# Altium PCB AICat V1.7 双面板 板厚1.6mm_lrd.PcbDoc (part 6 of 6)
Units mm, origin at the board's own origin, x right, y up, seen from the top; angles counter-clockwise.
Board outline 63.83 x 43.59 mm, 2 copper layers (Top Layer, Bottom Layer); 123 components, 84 nets, 332 pads, 255 vias.
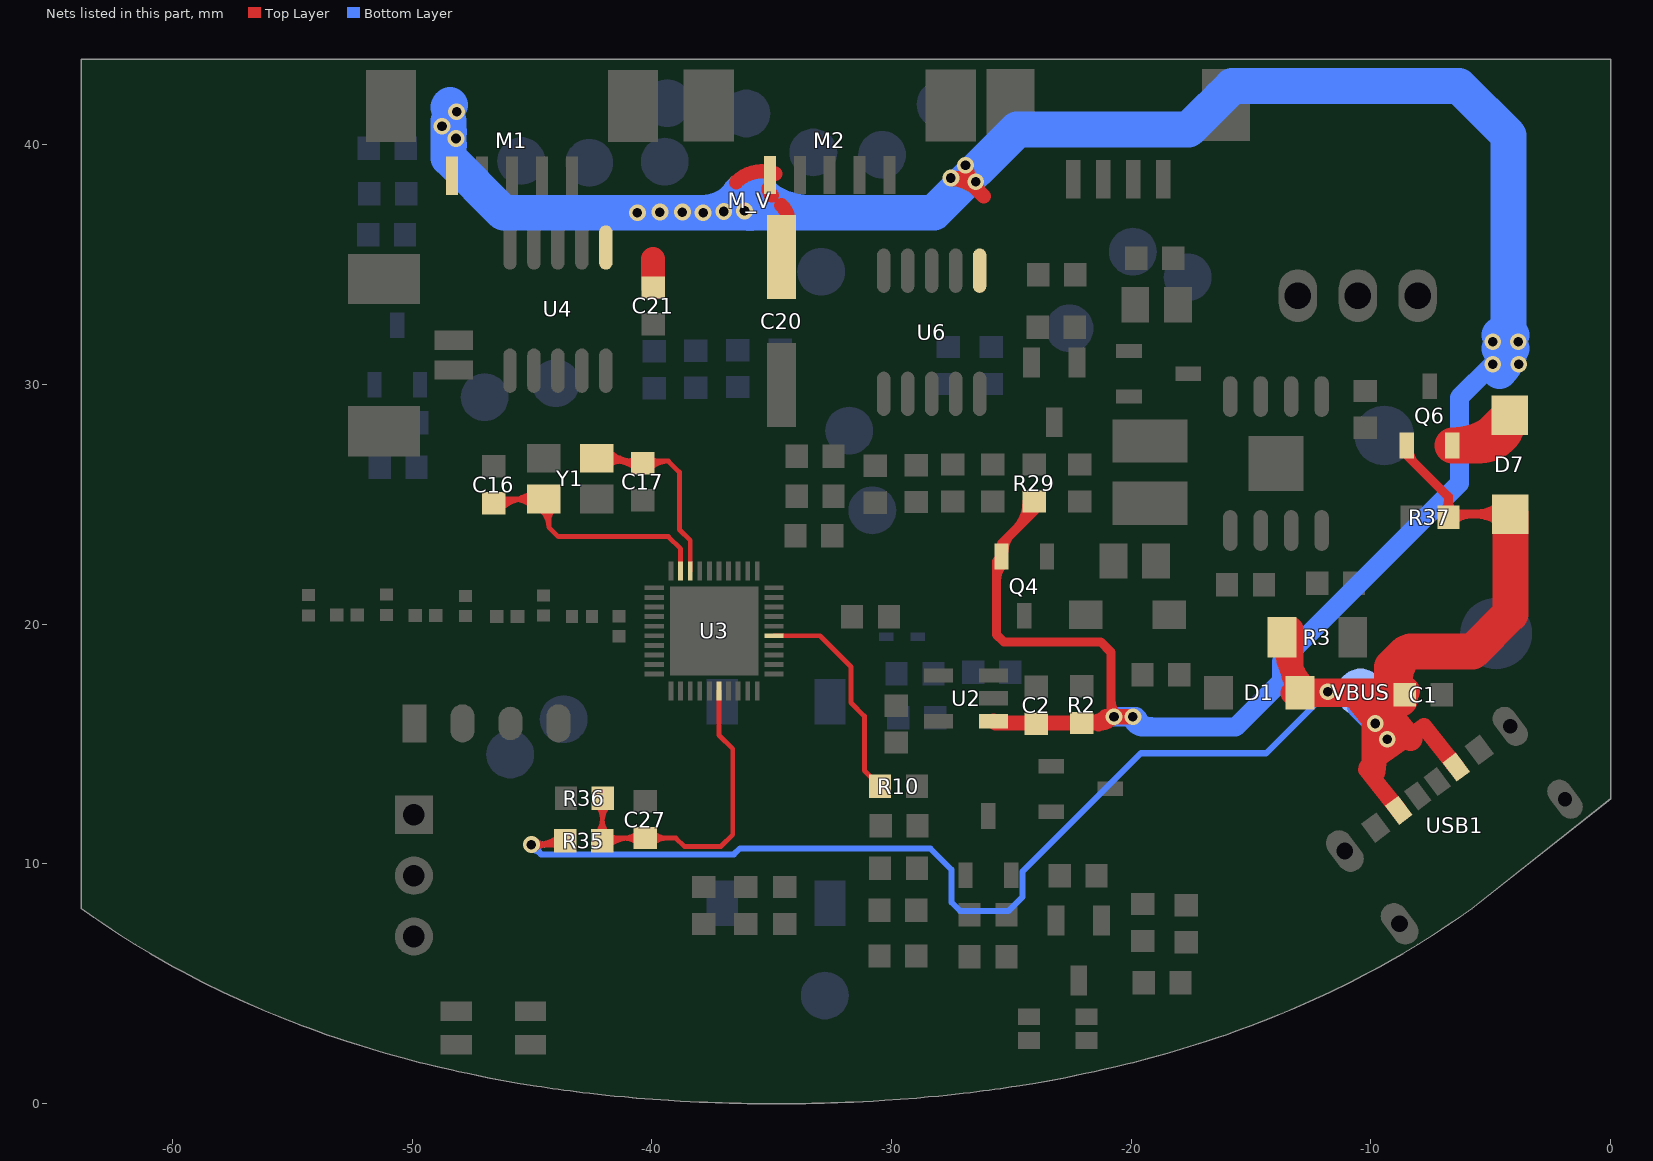
[diagram p6: the nets of this part, all layers, seen from the top]

## Via types
v1: diameter 0.7, hole 0.4, Top Layer to Bottom Layer, tented both sides, 255 vias

## Nets (pads, with @x,y where several pads share a name; then routed paths per layer and width w, separated by ;. In a path a pad name is that pad's centre, name@x,y a point inside that pad or via, vN(x,y) a via of type N, cw(c..) or ccw(c..) an arc to the next point about the centre after c; other vN are vias at no path point) (continued)
USB_DEC: C27.2 R35.2 R36.1 U3.6 | length 43.7
  Top Layer w0.203: R36.1@-42.047,12.731 -42.073,12.706 R35.2@-42.073,10.953 -41.954,11.072 C27.2@-40.277,11.072 -38.999,11.072 -38.652,10.724 -37.117,10.724 -36.625,11.216 -36.625,14.794 -37.203,15.372 U3.6@-37.203,17.214 ; R35.2@-42.33,11.235 ccw(c-42.95,11.855) -42.073,11.855 ; R35.2@-42.33,11.235 ccw(c-42.95,11.855) -42.073,11.855 ; R35.2@-42.33,11.235 ccw(c-42.95,11.855) -42.073,11.855 ; R35.2@-42.33,11.235 ccw(c-42.95,11.855) -42.073,11.855 ; R36.1@-42.304,12.449 cw(c-42.863,11.89) -42.073,11.89 ; R36.1@-42.304,12.449 cw(c-42.863,11.89) -42.073,11.89 ; R36.1@-42.304,12.449 cw(c-42.863,11.89) -42.073,11.89 ; R36.1@-42.304,12.449 cw(c-42.863,11.89) -42.073,11.89 ; -42.073,11.767 cw(c-41.109,11.767) R36.1@-41.79,12.449 ; -42.073,11.767 cw(c-41.109,11.767) R36.1@-41.79,12.449 ; -42.073,11.767 cw(c-41.109,11.767) R36.1@-41.79,12.449 ; -42.073,11.767 cw(c-41.109,11.767) R36.1@-41.79,12.449 ; -42.073,11.855 ccw(c-41.195,11.855) R35.2@-41.816,11.235 ; -42.073,11.855 ccw(c-41.195,11.855) R35.2@-41.816,11.235 ; -42.073,11.855 ccw(c-41.195,11.855) R35.2@-41.816,11.235 ; -42.073,11.855 ccw(c-41.195,11.855) R35.2@-41.816,11.235 ; R35.2@-41.959,10.865 cw(c-41.459,10.364) -41.459,11.072 ; R35.2@-41.959,10.865 cw(c-41.459,10.364) -41.459,11.072 ; R35.2@-41.959,10.865 cw(c-41.459,10.364) -41.459,11.072 ; R35.2@-41.959,10.865 cw(c-41.459,10.364) -41.459,11.072 ; R35.2@-41.816,10.721 cw(c-40.968,9.874) -40.968,11.072 ; R35.2@-41.816,10.721 cw(c-40.968,9.874) -40.968,11.072 ; R35.2@-41.816,10.721 cw(c-40.968,9.874) -40.968,11.072 ; R35.2@-41.816,10.721 cw(c-40.968,9.874) -40.968,11.072 ; R35.2@-41.816,11.235 ccw(c-41.422,11.628) -41.422,11.072 ; R35.2@-41.816,11.235 ccw(c-41.422,11.628) -41.422,11.072 ; R35.2@-41.816,11.235 ccw(c-41.422,11.628) -41.422,11.072 ; R35.2@-41.816,11.235 ccw(c-41.422,11.628) -41.422,11.072 ; -41.18,11.072 cw(c-41.18,10.195) C27.2@-40.559,10.815 ; -41.18,11.072 ccw(c-41.18,11.949) C27.2@-40.559,11.329 ; -41.18,11.072 cw(c-41.18,10.195) C27.2@-40.559,10.815 ; -41.18,11.072 ccw(c-41.18,11.949) C27.2@-40.559,11.329 ; -41.18,11.072 ccw(c-41.18,11.949) C27.2@-40.559,11.329 ; -41.18,11.072 cw(c-41.18,10.195) C27.2@-40.559,10.815 ; -41.18,11.072 ccw(c-41.18,11.949) C27.2@-40.559,11.329 ; -41.18,11.072 cw(c-41.18,10.195) C27.2@-40.559,10.815 ; C27.2@-39.995,10.815 cw(c-39.375,10.195) -39.375,11.072 ; C27.2@-39.995,10.815 cw(c-39.375,10.195) -39.375,11.072 ; C27.2@-39.995,10.815 cw(c-39.375,10.195) -39.375,11.072 ; C27.2@-39.995,10.815 cw(c-39.375,10.195) -39.375,11.072 ; C27.2@-39.995,11.329 ccw(c-39.375,11.949) -39.375,11.072 ; C27.2@-39.995,11.329 ccw(c-39.375,11.949) -39.375,11.072 ; C27.2@-39.995,11.329 ccw(c-39.375,11.949) -39.375,11.072 ; C27.2@-39.995,11.329 ccw(c-39.375,11.949) -39.375,11.072
V_BAT_CON: R10.2 U3.15 | length 9.6
  Top Layer w0.203: U3.15@-34.904,19.514 -32.988,19.514 -31.692,18.217 -31.692,16.719 -31.133,16.16 -31.133,14.534 ; -31.133,14.153 -31.133,14.534 ; R10.2@-30.481,13.239 -31.133,13.891 -31.133,14.534
VBUS_BAT: C2.2 C20.1 C21.2 D7.2 M1.5 M2.5 M_V.1 Q4.2 Q6.2 R2.1 R29.1 U2.1 U4.6 U6.6 | length 186.7
  Top Layer w0.203: C21.2@-40.258,34.05 C21.2@-39.947,34.05
  Top Layer w0.381: R29.1@-24.047,25.118 -24.047,24.72 -25.415,23.351 Q4.2@-25.415,22.823 -25.621,22.616 -25.621,19.564 -25.317,19.259 -21.278,19.259 -20.846,18.827 -20.846,16.355 v1@-21.067,16.135 ; -25.621,21.825 cw(c-24.653,21.825) Q4.2@-25.338,22.51 ; -25.621,21.825 cw(c-24.653,21.825) Q4.2@-25.338,22.51 ; -25.621,21.825 cw(c-24.653,21.825) Q4.2@-25.338,22.51 ; Q4.2@-25.306,23.058 cw(c-24.333,23.058) -25.021,23.746 ; Q4.2@-25.306,23.058 cw(c-24.333,23.058) -25.021,23.746 ; Q4.2@-25.306,23.058 cw(c-24.333,23.058) -25.021,23.746 ; -24.84,23.927 ccw(c-26.031,25.118) R29.1@-24.346,25.118 ; -24.84,23.927 ccw(c-26.031,25.118) R29.1@-24.346,25.118 ; -24.84,23.927 ccw(c-26.031,25.118) R29.1@-24.346,25.118 ; -24.189,24.577 ccw(c-24.73,25.118) R29.1@-23.965,25.118 ; -24.189,24.577 ccw(c-24.73,25.118) R29.1@-23.965,25.118 ; -24.189,24.577 ccw(c-24.73,25.118) R29.1@-23.965,25.118 ; -20.846,16.826 ccw(c-20.028,16.826) v1@-20.606,16.247 ; -20.846,16.826 ccw(c-20.028,16.826) v1@-20.606,16.247 ; -20.846,16.826 ccw(c-20.028,16.826) v1@-20.606,16.247
  Top Layer w0.508: C2.2@-24.109,15.709 C2.2@-23.97,15.847
  Top Layer w0.6: -36.485,38.443 cw(c-35.394,37.352) M2.5@-34.853,38.797 ; M2.5@-35.131,38.188 ccw(c-34.71,38.188) -35.008,37.891 ; -34.602,37.485 cw(c-35.36,36.727) C20.1@-34.291,36.644 ; -26.968,38.664 -26.155,37.852 ; v1@-27.526,38.564 cw(c-27.526,36.971) -26.4,38.097 ; v1@-27.526,38.564 cw(c-27.526,36.971) -26.4,38.097 ; v1@-27.526,38.564 cw(c-27.526,36.971) -26.4,38.097 ; v1@-27.511,38.566 cw(c-27.257,37.766) v1@-26.663,38.36 ; v1@-27.511,38.566 cw(c-27.257,37.766) v1@-26.663,38.36 ; v1@-27.511,38.566 cw(c-27.257,37.766) v1@-26.663,38.36 ; v1@-26.867,39.147 ccw(c-25.458,39.147) v1@-26.454,38.151 ; v1@-26.867,39.147 ccw(c-25.458,39.147) v1@-26.454,38.151 ; v1@-26.867,39.147 ccw(c-25.458,39.147) v1@-26.454,38.151 ; v1@-26.436,38.452 ccw(c-25.931,38.355) -26.295,37.991 cw(c-25.931,38.355) v1@-26.436,38.452
  Top Layer w0.635: U2.1@-25.744,15.955 -25.662,15.873 R2.1@-22.065,15.873 ; R2.1@-21.888,15.873 R2.1@-22.065,15.873 ; v1@-19.983,16.135 v1(-20.719,16.135) v1@-21.067,16.135 ; R2.1@-22.065,15.873 -21.329,15.873 ; R2.1@-21.97,16.002 ccw(c-21.607,16.675) v1@-21.067,16.135 ; R2.1@-21.97,16.002 ccw(c-21.607,16.675) v1@-21.067,16.135 ; R2.1@-21.97,16.002 ccw(c-21.607,16.675) v1@-21.067,16.135 ; -21.43,15.873 ccw(c-21.43,16.845) v1@-20.742,16.158 ; -21.43,15.873 ccw(c-21.43,16.845) v1@-20.742,16.158 ; -21.43,15.873 ccw(c-21.43,16.845) v1@-20.742,16.158 ; -21.368,15.833 cw(c-20.719,15.184) v1@-20.719,16.102 ; -21.368,15.833 cw(c-20.719,15.184) v1@-20.719,16.102 ; -21.368,15.833 cw(c-20.719,15.184) v1@-20.719,16.102 ; -21.329,15.873 ccw(c-21.329,16.618) v1@-20.745,16.155 ; -21.329,15.873 ccw(c-21.329,16.618) v1@-20.745,16.155 ; -21.329,15.873 ccw(c-21.329,16.618) v1@-20.745,16.155 ; -21.329,15.873 v1@-21.067,16.135
  Top Layer w1: C21.2@-39.947,34.05 -39.947,35.235
  Top Layer w1.5: D7.2@-4.209,28.706 -5.46,27.455 ; Q6.2@-6.6,27.455 ccw(c-6.6,30.412) D7.2@-4.221,28.655 ; Q6.2@-6.6,27.455 ccw(c-6.6,30.412) D7.2@-4.221,28.655 ; Q6.2@-6.6,27.455 ccw(c-6.6,30.412) D7.2@-4.221,28.655 ; Q6.2@-6.6,27.455 -5.46,27.455 ; -5.46,27.455 ccw(c-5.46,28.692) D7.2@-4.224,28.647 ; -5.46,27.455 ccw(c-5.46,28.692) D7.2@-4.224,28.647 ; -5.46,27.455 ccw(c-5.46,28.692) D7.2@-4.224,28.647
  Bottom Layer w0.8: v1@-20.745,16.16 v1(-20.719,16.135) v1(-19.932,16.135) -19.805,16.135 -19.729,16.058 -19.729,15.957 -19.475,15.703 ; v1(-4.92,30.841) -6.299,29.462 -6.299,25.881 -13.734,18.446 -13.734,17.616 -15.648,15.703 -19.475,15.703 ; v1@-19.981,16.126 ccw(c-19.475,16.217) -19.475,15.703 ; v1@-19.981,16.126 ccw(c-19.475,16.217) -19.475,15.703 ; v1@-19.981,16.126 ccw(c-19.475,16.217) -19.475,15.703 ; v1@-19.967,16.099 ccw(c-19.01,17.056) -19.01,15.703 ; v1@-19.967,16.099 ccw(c-19.01,17.056) -19.01,15.703 ; v1@-19.967,16.099 ccw(c-19.01,17.056) -19.01,15.703
  Bottom Layer w1.5: -48.481,41.001 -48.481,39.452 -46.195,37.166 -42.258,37.166 ; -44.189,37.166 -42.258,37.166 ; M_V.1@-36.316,37.964 cw(c-37.864,39.067) v1(-37.864,37.166) ; M_V.1@-35.555,38.027 ccw(c-33.475,40.107) -33.475,37.166 ; -4.26,31.705 -4.26,40.392 -6.317,42.449 -15.792,42.449 -16.274,41.966 -16.997,41.243 -17.603,40.638 -23.742,40.638 -24.766,40.638 -28.238,37.166 -28.847,37.166 -30.092,37.166 v1(-37.864,37.166) ; -48.481,41.551 cw(c-48.32,41.551) -48.434,41.665 ; -48.481,41.551 cw(c-48.32,41.551) -48.434,41.665 ; -48.481,41.551 cw(c-48.32,41.551) -48.434,41.665 ; -48.481,41.551 cw(c-48.32,41.551) -48.434,41.665 ; -42.258,37.166 v1(-40.607,37.166) ; -42.258,37.166 v1(-40.607,37.166) ; v1(-40.607,37.166) v1(-37.864,37.166) ; -4.638,30.558 ccw(c-5.549,31.47) -4.26,31.47 ; -4.638,30.558 ccw(c-5.549,31.47) -4.26,31.47 ; -4.638,30.558 ccw(c-5.549,31.47) -4.26,31.47 ; -4.638,30.558 ccw(c-5.549,31.47) -4.26,31.47 ; -4.638,30.558 ccw(c-5.549,31.47) -4.26,31.47 ; -4.638,30.558 ccw(c-5.549,31.47) -4.26,31.47 ; -4.638,31.498 ccw(c-5.549,32.41) -4.26,32.41 ; -4.638,31.498 ccw(c-5.549,32.41) -4.26,32.41 ; -4.638,31.498 ccw(c-5.549,32.41) -4.26,32.41 ; -4.638,32.064 cw(c-5.549,31.152) -4.26,31.152 ; -4.638,32.064 cw(c-5.549,31.152) -4.26,31.152 ; -4.638,32.064 cw(c-5.549,31.152) -4.26,31.152 ; -4.26,31.766 cw(c-3.838,31.766) -4.136,32.064 ; -4.26,31.766 cw(c-3.838,31.766) -4.136,32.064 ; -4.26,31.766 cw(c-3.838,31.766) -4.136,32.064 ; -4.26,31.796 ccw(c-3.838,31.796) -4.136,31.498 ; -4.26,31.796 ccw(c-3.838,31.796) -4.136,31.498 ; -4.26,31.796 ccw(c-3.838,31.796) -4.136,31.498 ; -48.481,40.035 ccw(c-48.406,40.035) -48.459,39.982 cw(c-48.406,40.035) -48.481,40.035 ; -48.481,40.494 cw(c-48.406,40.494) -48.459,40.547 ccw(c-48.406,40.494) -48.481,40.494
  other v1: -3.828,30.841 -4.92,31.781 -3.854,31.781 -39.668,37.191 -38.728,37.191 -37.001,37.217 -36.137,37.242 -26.485,38.461 -27.526,38.614 -26.917,39.147 -48.177,40.265 -48.761,40.773 -48.151,41.382
VCC_USB: C1.2 D1.2 D7.1 Q6.1 R3.2 R35.1 R37.2 USB1.A9 USB1.B9 VBUS.1 | length 160
  Top Layer w0.254: v1(-45.027,10.801) -43.765,10.801 R35.1@-43.613,10.953 ; v1@-44.869,10.643 cw(c-44.489,10.262) -44.489,10.801 ; v1@-44.869,10.643 cw(c-44.489,10.262) -44.489,10.801 ; v1@-44.869,10.643 cw(c-44.489,10.262) -44.489,10.801 ; v1@-44.869,10.643 cw(c-44.489,10.262) -44.489,10.801 ; v1@-44.869,10.958 ccw(c-44.489,11.339) -44.489,10.801 ; v1@-44.869,10.958 ccw(c-44.489,11.339) -44.489,10.801 ; v1@-44.869,10.958 ccw(c-44.489,11.339) -44.489,10.801 ; v1@-44.869,10.958 ccw(c-44.489,11.339) -44.489,10.801 ; v1@-44.736,10.801 ccw(c-44.736,12.052) R35.1@-43.852,11.167 ; v1@-44.736,10.801 ccw(c-44.736,12.052) R35.1@-43.852,11.167 ; v1@-44.736,10.801 ccw(c-44.736,12.052) R35.1@-43.852,11.167 ; -44.123,10.801 ccw(c-44.123,11.438) R35.1@-43.672,10.987 ; -44.123,10.801 ccw(c-44.123,11.438) R35.1@-43.672,10.987 ; -44.123,10.801 ccw(c-44.123,11.438) R35.1@-43.672,10.987 ; -44.121,10.801 cw(c-44.121,10.42) R35.1@-43.852,10.689 ; -44.121,10.801 cw(c-44.121,10.42) R35.1@-43.852,10.689 ; -44.121,10.801 cw(c-44.121,10.42) R35.1@-43.852,10.689
  Top Layer w0.381: Q6.1@-8.5,27.455 -8.5,27.055 -6.767,25.321 R37.2@-6.767,24.466 -6.641,24.591 D7.1@-4.184,24.591 ; Q6.1@-8.39,27.22 ccw(c-7.726,27.22) -8.196,26.751 ; Q6.1@-8.39,27.22 ccw(c-7.726,27.22) -8.196,26.751 ; Q6.1@-8.39,27.22 ccw(c-7.726,27.22) -8.196,26.751 ; R37.2@-6.961,24.685 ccw(c-7.429,25.153) -6.767,25.153 ; R37.2@-6.961,24.685 ccw(c-7.429,25.153) -6.767,25.153 ; R37.2@-6.961,24.685 ccw(c-7.429,25.153) -6.767,25.153 ; -6.767,25.153 ccw(c-6.104,25.153) R37.2@-6.572,24.685 ; -6.767,25.153 ccw(c-6.104,25.153) R37.2@-6.572,24.685 ; -6.767,25.153 ccw(c-6.104,25.153) R37.2@-6.572,24.685 ; R37.2@-6.572,24.297 cw(c-5.862,23.586) -5.862,24.591 ; R37.2@-6.572,24.297 cw(c-5.862,23.586) -5.862,24.591 ; R37.2@-6.572,24.297 cw(c-5.862,23.586) -5.862,24.591 ; -5.571,24.591 cw(c-5.571,23.204) D7.1@-4.59,24.185 ; -5.571,24.591 ccw(c-5.571,25.978) D7.1@-4.59,24.997 ; -5.571,24.591 ccw(c-5.571,25.978) D7.1@-4.59,24.997 ; -5.571,24.591 cw(c-5.571,23.204) D7.1@-4.59,24.185 ; -5.571,24.591 ccw(c-5.571,25.978) D7.1@-4.59,24.997 ; -5.571,24.591 cw(c-5.571,23.204) D7.1@-4.59,24.185
  Top Layer w0.7: -10.185,13.922 USB1.B9@-8.836,12.228 ; -10.177,14.026 -7.79,15.728 USB1.A9@-6.441,14.033 ; v1(-9.315,15.195) ccw(c-9.06,16.714) -8.166,15.46 cw(c-9.06,16.714) v1(-9.315,15.195) ; v1(-9.315,15.195) cw(c-10.768,15.409) -9.915,14.213 ccw(c-10.768,15.409) v1(-9.315,15.195)
  Top Layer w1: R3.2@-13.556,19.31 ccw(c-10.654,19.31) D1.2@-12.706,17.257 ; R3.2@-13.302,19.804 -13.302,18.268 ; D1.2@-13.265,17.135 -13.223,17.176 D1.2@-12.833,17.176 ; -10.522,16.791 -9.792,15.88 -9.271,15.229 v1@-9.162,15.093 ; -9.893,17.135 -9.893,13.856 -9.574,16.737 -9.34,16.445 -8.603,15.525 ; R3.2@-13.776,19.119 cw(c-14.468,18.182) -13.302,18.182 ; R3.2@-13.776,19.119 cw(c-14.468,18.182) -13.302,18.182 ; R3.2@-13.776,19.119 cw(c-14.468,18.182) -13.302,18.182 ; -13.302,18.268 ccw(c-11.974,18.268) D1.2@-12.891,17.307 ; -13.302,18.268 ccw(c-11.974,18.268) D1.2@-12.891,17.307 ; -13.302,18.268 ccw(c-11.974,18.268) D1.2@-12.891,17.307 ; -13.302,18.303 ccw(c-11.892,18.303) D1.2@-12.889,17.305 ; -13.302,18.303 ccw(c-11.892,18.303) D1.2@-12.889,17.305 ; -13.302,18.303 ccw(c-11.892,18.303) D1.2@-12.889,17.305 ; v1@-9.884,15.992 cw(c-9.498,15.126) -8.759,15.719 ccw(c-9.498,15.126) v1@-9.884,15.992 ; v1@-9.806,16.004 cw(c-10.046,13.835) -8.343,15.2 ccw(c-10.046,13.835) v1@-9.806,16.004 ; -9.643,16.823 cw(c-11.39,15.424) -9.166,15.178 ccw(c-11.39,15.424) -9.643,16.823
  Top Layer w1.2: D1.2@-12.833,17.135 -9.893,17.135 -9.527,17.135 -9.492,17.1 -9.264,17.328 -9.111,17.328 C1.2@-9.018,17.328 ; -9.73,16.862 cw(c-8.829,15.962) C1.2@-8.557,17.206 ; -9.73,16.862 cw(c-8.829,15.962) C1.2@-8.557,17.206 ; -9.73,16.862 cw(c-8.829,15.962) C1.2@-8.557,17.206
  Top Layer w1.5: -9.111,17.295 -9.111,17.328 -9.111,18.217 -8.522,18.807 ; D7.1@-4.184,24.591 -4.184,20.427 -5.759,18.852 -8.359,18.852 -8.405,18.807 -8.522,18.807 ; -9.111,17.654 ccw(c-8.006,17.654) C1.2@-8.788,16.872 ; -9.111,17.654 ccw(c-8.006,17.654) C1.2@-8.788,16.872 ; -9.111,17.654 ccw(c-8.006,17.654) C1.2@-8.788,16.872 ; C1.2@-8.844,16.952 cw(c-7.367,17.651) -8.522,18.807 ; C1.2@-8.844,16.952 cw(c-7.367,17.651) -8.522,18.807 ; C1.2@-8.844,16.952 cw(c-7.367,17.651) -8.522,18.807
  Bottom Layer w0.254: v1(-45.027,10.801) -44.617,10.39 -36.582,10.39 -36.333,10.639 -28.381,10.639 -27.501,9.759 -27.501,8.388 -27.145,8.032 -25.113,8.032 -24.529,8.616 -24.529,9.683 -19.602,14.611 -14.369,14.611 v1(-11.804,17.176) ; v1@-44.869,10.643 cw(c-44.489,10.262) -44.489,10.801 cw(c-44.489,11.339) v1@-44.869,10.958 ; VBUS.1@-10.483,17.151 -10.508,17.176 v1(-11.804,17.176) ; v1@-45.027,10.578 cw(c-45.027,10.039) -44.646,10.42 ; v1@-45.027,10.578 cw(c-45.027,10.039) -44.646,10.42 ; v1@-45.027,10.578 cw(c-45.027,10.039) -44.646,10.42 ; v1@-44.804,10.801 ccw(c-44.266,10.801) -44.646,10.42 ; v1@-44.804,10.801 ccw(c-44.266,10.801) -44.646,10.42 ; v1@-44.804,10.801 ccw(c-44.266,10.801) -44.646,10.42 ; -12.185,16.795 cw(c-11.804,16.415) v1@-11.804,16.953 ; -12.185,16.795 ccw(c-12.565,17.176) v1@-12.027,17.176 ; -12.185,16.795 ccw(c-12.565,17.176) v1@-12.027,17.176 ; -12.185,16.795 cw(c-11.804,16.415) v1@-11.804,16.953 ; -12.185,16.795 ccw(c-12.565,17.176) v1@-12.027,17.176 ; -12.185,16.795 cw(c-11.804,16.415) v1@-11.804,16.953 ; v1(-11.804,17.176) ccw(c-11.804,17.836) -11.213,17.541 cw(c-11.804,17.836) v1(-11.804,17.176) ; v1(-11.804,17.176) cw(c-11.804,16.553) -11.233,16.802 ccw(c-11.804,16.553) v1(-11.804,17.176) ; VBUS.1@-11.265,17.176 ccw(c-11.265,16.638) -11.646,17.018 cw(c-11.265,16.638) VBUS.1@-11.265,17.176 ; VBUS.1@-11.265,17.176 cw(c-11.265,17.714) -11.646,17.334 ccw(c-11.265,17.714) VBUS.1@-11.265,17.176
  Bottom Layer w1: VBUS.1@-10.483,17.151 -10.483,16.516 v1@-9.238,15.271 ; VBUS.1@-9.95,17.017 ccw(c-8.564,16.632) -9.581,15.614 cw(c-8.564,16.632) VBUS.1@-9.95,17.017
  other v1: -9.823,15.855
XC1: C16.2 U3.29 Y1.1 | length 47.2
  Top Layer w0.203: C16.2@-46.602,25.042 -46.426,25.218 -44.302,25.218 -44.302,24.045 -43.909,23.653 -39.312,23.653 -38.803,23.144 U3.29@-38.803,22.213 ; C16.2@-46.464,24.929 cw(c-45.765,24.23) -45.765,25.218 ; C16.2@-46.464,24.929 cw(c-45.765,24.23) -45.765,25.218 ; C16.2@-46.464,24.929 cw(c-45.765,24.23) -45.765,25.218 ; C16.2@-46.464,24.929 cw(c-45.765,24.23) -45.765,25.218 ; C16.2@-46.464,24.929 cw(c-45.765,24.23) -45.765,25.218 ; C16.2@-46.32,24.785 cw(c-45.274,23.74) -45.274,25.218 ; C16.2@-46.32,24.785 cw(c-45.274,23.74) -45.274,25.218 ; C16.2@-46.32,24.785 cw(c-45.274,23.74) -45.274,25.218 ; C16.2@-46.32,24.785 cw(c-45.274,23.74) -45.274,25.218 ; C16.2@-46.32,24.785 cw(c-45.274,23.74) -45.274,25.218 ; C16.2@-46.32,25.299 ccw(c-46.125,25.494) C16.2@-46.125,25.218 ; C16.2@-46.32,25.299 ccw(c-46.125,25.494) C16.2@-46.125,25.218 ; C16.2@-46.32,25.299 ccw(c-46.125,25.494) C16.2@-46.125,25.218 ; C16.2@-46.32,25.299 ccw(c-46.125,25.494) C16.2@-46.125,25.218 ; C16.2@-46.32,25.299 ccw(c-46.125,25.494) C16.2@-46.125,25.218 ; -45.808,25.218 cw(c-45.808,24.015) Y1.1@-44.957,24.866 ; -45.808,25.218 ccw(c-45.808,26.421) Y1.1@-44.957,25.57 ; -45.808,25.218 cw(c-45.808,24.015) Y1.1@-44.957,24.866 ; -45.808,25.218 ccw(c-45.808,26.421) Y1.1@-44.957,25.57 ; -45.808,25.218 ccw(c-45.808,26.421) Y1.1@-44.957,25.57 ; -45.808,25.218 cw(c-45.808,24.015) Y1.1@-44.957,24.866 ; -45.808,25.218 ccw(c-45.808,26.421) Y1.1@-44.957,25.57 ; -45.808,25.218 cw(c-45.808,24.015) Y1.1@-44.957,24.866 ; -45.808,25.218 ccw(c-45.808,26.421) Y1.1@-44.957,25.57 ; -45.808,25.218 cw(c-45.808,24.015) Y1.1@-44.957,24.866 ; -45.318,25.218 cw(c-45.318,24.505) Y1.1@-44.814,25.009 ; -45.318,25.218 ccw(c-45.318,25.931) Y1.1@-44.814,25.427 ; -45.318,25.218 cw(c-45.318,24.505) Y1.1@-44.814,25.009 ; -45.318,25.218 ccw(c-45.318,25.931) Y1.1@-44.814,25.427 ; -45.318,25.218 ccw(c-45.318,25.931) Y1.1@-44.814,25.427 ; -45.318,25.218 cw(c-45.318,24.505) Y1.1@-44.814,25.009 ; -45.318,25.218 ccw(c-45.318,25.931) Y1.1@-44.814,25.427 ; -45.318,25.218 cw(c-45.318,24.505) Y1.1@-44.814,25.009 ; -45.318,25.218 ccw(c-45.318,25.931) Y1.1@-44.814,25.427 ; -45.318,25.218 cw(c-45.318,24.505) Y1.1@-44.814,25.009 ; Y1.1@-44.697,24.814 cw(c-45.256,24.041) -44.302,24.041 ; Y1.1@-44.697,24.814 cw(c-45.256,24.041) -44.302,24.041 ; Y1.1@-44.697,24.814 cw(c-45.256,24.041) -44.302,24.041 ; Y1.1@-44.697,24.814 cw(c-45.256,24.041) -44.302,24.041 ; Y1.1@-44.697,24.814 cw(c-45.256,24.041) -44.302,24.041 ; Y1.1@-44.578,24.979 cw(c-44.969,24.438) -44.302,24.438 ; Y1.1@-44.578,24.979 cw(c-44.969,24.438) -44.302,24.438 ; Y1.1@-44.578,24.979 cw(c-44.969,24.438) -44.302,24.438 ; Y1.1@-44.578,24.979 cw(c-44.969,24.438) -44.302,24.438 ; Y1.1@-44.578,24.979 cw(c-44.969,24.438) -44.302,24.438 ; -44.302,24.264 cw(c-43.451,24.264) Y1.1@-44.052,24.866 ; -44.302,24.264 cw(c-43.451,24.264) Y1.1@-44.052,24.866 ; -44.302,24.264 cw(c-43.451,24.264) Y1.1@-44.052,24.866 ; -44.302,24.264 cw(c-43.451,24.264) Y1.1@-44.052,24.866 ; -44.302,24.264 cw(c-43.451,24.264) Y1.1@-44.052,24.866
XC2: C17.2 U3.28 Y1.3 | length 40.4
  Top Layer w0.203: Y1.3@-42.102,26.918 -41.986,26.803 -39.312,26.803 ; U3.28@-38.403,22.213 -38.403,23.495 -38.855,23.946 -38.855,26.345 -39.312,26.803 ; Y1.3@-41.996,27.127 ccw(c-41.213,27.91) -41.213,26.803 ; Y1.3@-41.996,27.127 ccw(c-41.213,27.91) -41.213,26.803 ; Y1.3@-41.996,27.127 ccw(c-41.213,27.91) -41.213,26.803 ; Y1.3@-41.996,27.127 ccw(c-41.213,27.91) -41.213,26.803 ; Y1.3@-41.996,27.127 ccw(c-41.213,27.91) -41.213,26.803 ; Y1.3@-41.852,26.566 cw(c-41.28,25.994) -41.28,26.803 ; Y1.3@-41.852,26.566 cw(c-41.28,25.994) -41.28,26.803 ; Y1.3@-41.852,26.566 cw(c-41.28,25.994) -41.28,26.803 ; Y1.3@-41.852,26.566 cw(c-41.28,25.994) -41.28,26.803 ; Y1.3@-41.852,26.566 cw(c-41.28,25.994) -41.28,26.803 ; Y1.3@-41.852,27.27 ccw(c-40.723,28.4) C17.2@-40.723,26.803 ; Y1.3@-41.852,27.27 ccw(c-40.723,28.4) C17.2@-40.723,26.803 ; Y1.3@-41.852,27.27 ccw(c-40.723,28.4) C17.2@-40.723,26.803 ; Y1.3@-41.852,27.27 ccw(c-40.723,28.4) C17.2@-40.723,26.803 ; Y1.3@-41.852,27.27 ccw(c-40.723,28.4) C17.2@-40.723,26.803 ; -41.507,26.803 cw(c-41.507,25.606) C17.2@-40.661,26.452 ; -41.507,26.803 cw(c-41.507,25.606) C17.2@-40.661,26.452 ; -41.507,26.803 cw(c-41.507,25.606) C17.2@-40.661,26.452 ; -41.507,26.803 cw(c-41.507,25.606) C17.2@-40.661,26.452 ; -41.507,26.803 cw(c-41.507,25.606) C17.2@-40.661,26.452 ; -41.055,26.803 ccw(c-41.055,27.36) C17.2@-40.661,26.966 ; -41.055,26.803 ccw(c-41.055,27.36) C17.2@-40.661,26.966 ; -41.055,26.803 ccw(c-41.055,27.36) C17.2@-40.661,26.966 ; -41.055,26.803 ccw(c-41.055,27.36) C17.2@-40.661,26.966 ; -41.055,26.803 ccw(c-41.055,27.36) C17.2@-40.661,26.966 ; -41.017,26.803 cw(c-41.017,26.096) C17.2@-40.517,26.596 ; -41.017,26.803 cw(c-41.017,26.096) C17.2@-40.517,26.596 ; -41.017,26.803 cw(c-41.017,26.096) C17.2@-40.517,26.596 ; -41.017,26.803 cw(c-41.017,26.096) C17.2@-40.517,26.596 ; -41.017,26.803 cw(c-41.017,26.096) C17.2@-40.517,26.596 ; C17.2@-40.236,26.6 cw(c-39.775,26.176) -39.775,26.803 ; C17.2@-40.236,26.6 cw(c-39.775,26.176) -39.775,26.803 ; C17.2@-40.236,26.6 cw(c-39.775,26.176) -39.775,26.803 ; C17.2@-40.236,26.6 cw(c-39.775,26.176) -39.775,26.803 ; C17.2@-40.236,26.6 cw(c-39.775,26.176) -39.775,26.803 ; C17.2@-40.097,26.966 ccw(c-39.703,27.36) -39.703,26.803 ; C17.2@-40.097,26.966 ccw(c-39.703,27.36) -39.703,26.803 ; C17.2@-40.097,26.966 ccw(c-39.703,27.36) -39.703,26.803 ; C17.2@-40.097,26.966 ccw(c-39.703,27.36) -39.703,26.803 ; C17.2@-40.097,26.966 ccw(c-39.703,27.36) -39.703,26.803 ; C17.2@-40.086,26.463 cw(c-39.312,25.75) -39.312,26.803 ; C17.2@-40.086,26.463 cw(c-39.312,25.75) -39.312,26.803 ; C17.2@-40.086,26.463 cw(c-39.312,25.75) -39.312,26.803 ; C17.2@-40.086,26.463 cw(c-39.312,25.75) -39.312,26.803 ; C17.2@-40.086,26.463 cw(c-39.312,25.75) -39.312,26.803
pads on no net: M1.6 M1.7 M2.6 M2.7 U1.6 U2.4 U3.33 U3.35 U3.36 U3.37

## Polygon pours and split planes (outlines as drawn)
GND on Top Layer "Bottom Layer-No Net" (solid, remove dead copper, pour order 1003): -54.908,43.562 -54.901,43.555 -54.901,3.372 -54.901,3.301 -52.926,1.326 -51.453,-0.147 -23.539,-0.147 -14.928,-0.147 -8.273,6.508 -10.712,8.946 -10.712,9.988 -10.661,9.988 -9.746,10.902 -8.121,12.528 -7.308,12.528 -7.079,12.528 -6.14,13.468 -5.454,14.153 -4.997,14.153 -4.514,14.153 -3.625,15.042 -0.77,12.187 -0.77,12.118 -0.72,12.118 -0.532,12.306 -0.532,43.562 -15.817,43.562 -17.468,43.562 -17.468,37.775 -17.519,37.725 -17.62,37.623 -49.726,37.623 -49.726,43.562
GND on Top Layer "Bottom Layer-No Net" (solid, remove dead copper, pour order 1002): -54.908,22.37 -54.906,22.369 -54.906,16.389 -53.676,16.389 -52.49,17.575 -50.859,19.206 -40.684,19.206 -40.684,20.704 -41.769,21.789 -47.161,21.789 -50.684,21.789 -52.771,23.876 -52.838,23.943 -54.694,23.943
no net on Top Layer "Bottom Layer-No Net" (solid, remove dead copper, pour order 1005): -56.172,32.301 -61.572,32.301 -61.572,29.401 -58.072,29.401 -58.072,27.651 -61.572,27.651 -61.572,24.751 -58.072,24.751 -58.072,23.001 -61.572,23.001 -61.572,17.721 -54.892,17.721 -54.892,18.321 -60.972,18.321 -60.972,20.071 -54.892,20.071 -54.892,20.661 -60.972,20.661 -60.972,22.411 -57.472,22.411 -57.472,25.311 -60.972,25.311 -60.972,27.061 -57.472,27.061 -57.472,29.961 -60.972,29.961 -60.972,31.711 -56.172,31.711 -56.172,32.301
GND on Bottom Layer "Bottom Layer-No Net" (solid, remove dead copper, pour order 1004): -54.914,43.558 -54.906,43.551 -54.906,3.368 -54.901,3.368 -52.526,1.22 -51.094,-0.075 -15.702,-0.075 -8.68,-0.075 4.718,12.041 4.802,12.117 4.802,13.895 4.802,15.774 -0.591,20.651 -0.603,20.662 -0.603,43.558

## Keep-outs
Keep-Out Layer:
  circle w0.025: c-13.316,6.562 r0.8
  circle w0.025: c-8.8,20.562 r0.8
  circle w0.025: c-16.8,12.562 r1.35
  circle w0.025: c-9.8,39.562 r1.35
  circle w0.025: c-59.8,11.562 r1.35
  circle w0.025: c-59.8,39.562 r1.35
  lines w0.025: -5.795,43.562 -63.804,43.562 ; 0,12.727 -5.795,8.142 cw(c-27.667,38.573) -6.804,7.441 cw(c-27.845,38.838) -8.675,6.265 -9.221,5.95 -9.629,5.722 -9.992,5.525 -10.309,5.356 -10.579,5.215 -10.852,5.076 cw(c-29.195,41.321) -12.58,4.252 -13.157,3.999 -13.61,3.807 -14.014,3.642 -14.368,3.5 -14.698,3.372 -15.004,3.256 -15.312,3.142 -15.651,3.019 -16.023,2.888 -16.427,2.749 -16.864,2.604 -17.336,2.453 -17.873,2.288 -18.477,2.111 -19.181,1.915 -19.708,1.775 -19.927,1.72 -20.146,1.665 -20.398,1.603 -20.651,1.542 -20.936,1.475 -21.223,1.41 -21.543,1.339 -21.896,1.263 -22.283,1.183 -22.737,1.093 -23.291,0.988 -24.109,0.844 -24.8,0.733 -24.998,0.702 -25.229,0.668 -25.46,0.634 -25.691,0.602 -25.923,0.57 -26.187,0.535 -26.452,0.501 -26.716,0.469 -27.014,0.433 -27.344,0.396 -27.674,0.36 -28.036,0.323 -28.464,0.282 -28.956,0.239 -29.642,0.184 -30.291,0.14 -30.775,0.11 -31.193,0.088 -31.577,0.07 -31.928,0.055 -32.247,0.043 -32.533,0.034 -32.818,0.025 -33.071,0.019 -33.324,0.014 -33.576,0.009 -33.796,0.006 -34.016,0.003 -34.236,0.001 -34.424,0 -34.612,0 -34.8,-0.001 -34.987,0 -35.175,0 -35.363,0.001 -35.583,0.003 -35.803,0.006 -36.023,0.009 -36.275,0.014 -36.528,0.019 -36.781,0.025 -37.066,0.034 -37.352,0.043 -37.671,0.055 -38.022,0.07 -38.406,0.088 -38.824,0.11 -39.308,0.14 -39.957,0.184 -40.643,0.239 -41.135,0.282 -41.563,0.323 -41.925,0.36 -42.255,0.396 -42.586,0.433 -42.883,0.469 -43.147,0.501 -43.412,0.535 -43.676,0.57 -43.908,0.602 -44.139,0.634 -44.37,0.668 -44.601,0.702 -44.799,0.733 -45.49,0.844 -46.308,0.988 -46.862,1.093 -47.316,1.183 -47.703,1.263 -48.056,1.339 -48.376,1.41 -48.663,1.475 -48.948,1.542 -49.201,1.603 -49.453,1.665 -49.672,1.72 -49.891,1.775 -50.418,1.915 -51.122,2.111 -51.726,2.288 -52.263,2.453 -52.735,2.604 -53.172,2.749 -53.576,2.888 -53.948,3.019 -54.287,3.142 -54.595,3.256 -54.901,3.372 -55.231,3.5 -55.585,3.642 -55.989,3.807 -56.442,3.999 -57.019,4.252 cw(c-40.404,41.321) -58.747,5.076 -59.02,5.215 -59.29,5.356 -59.607,5.525 -59.97,5.722 -60.378,5.95 -60.924,6.265 cw(c-41.754,38.838) -62.795,7.441 cw(c-41.932,38.573) -63.804,8.142 -63.804,43.562 ; 0,12.741 0,43.562 -63.804,43.562

## Other copper
Top Layer:
  rectangle net GND: -29.69,19.807 -28.879,21.139
  rectangle net GND: -32.893,23.148 -31.789,28.207
  rectangle net GND: -16.378,39.114 -15.464,40.671
  rectangle net GND: -21.707,22.154 -20.873,22.7
  rectangle net GND: -42.411,19.078 -41.098,19.277
  rectangle net GND: -48.479,14.136 -47.323,17.867
  rectangle net GND: -7.491,33.262 -6.472,34.042
  rectangle net GND: -8.454,31.855 -7.595,33.114
  rectangle net GND: -16.919,23.493 -15.868,24.532
  rectangle net GND: -26.328,29.226 -25.342,29.912
  rectangle net GND: -16.823,41.047 -13.912,41.895
  rectangle net GND: -35.024,31.464 -34.262,32.632
  rectangle net GND: -41.044,31.657 -38.362,32.175
  rectangle net GND: -42.187,30.945 -41.659,32.098
  rectangle net GND: -41.819,30.181 -40.742,31.022
  rectangle net GND: -54.707,21.08 -53.914,21.335
  rectangle net GND: -45.198,21.52 -44.929,21.789
  rectangle net GND: -44.109,21.33 -43.913,21.789
  rectangle net GND: -54.906,21.567 -41.769,21.997
  rectangle net GND: -43.013,24.169 -39.901,24.743
  rectangle net NetANT1_1: -54.428,20.064 -54.052,20.661
  rectangle net GND: -24.351,42.703 -9.543,43.16
  rectangle net GND: -24.654,37.14 -23.259,40.752
  rectangle net GND: -8.887,32.695 -7.21,34.778
  rectangle net VBUS_BAT: -27.984,38.258 -25.545,39.426
  rectangle net VCC_USB: -8.985,16.001 -8.502,16.668
  rectangle net VBUS_BAT: -26.587,34.067 -25.52,38.817
  rectangle net VBUS_BAT: -42.208,34.778 -34.486,39.274
  rectangle net VBUS_BAT: -49.066,37.369 -47.796,41.763
  rectangle net GND: -16.808,25.329 -9.619,27.92
  rectangle net NetBAT1_2: -11.372,32.619 -9.746,34.804
  rectangle net GND: -54.904,16.389 -53.841,18.654
  rectangle net GND: -53.815,33.584 -47.897,35.388
  rectangle net GND: -20.338,37.877 -19.551,43.135
  rectangle net BAT+: -13.887,32.695 -12.21,34.778
  rectangle net GND: -32.227,19.28 -31.896,19.505
  rectangle net VBUS_BAT: -5.276,27.717 -3.117,32.213
  rectangle net GND: -20.338,37.013 -19.547,37.877
  rectangle net NetANT1_1: -55.007,20.064 -54.428,20.661
Bottom Layer:
  rectangle net GND: -29.294,19.284 -28.934,20.547
  rectangle net GND: -33.113,26.727 -29.876,30.31
  rectangle net GND: -7.298,33.206 -6.622,34.052
  rectangle net GND: -8.418,31.822 -7.778,35.619
  rectangle net GND: -8.897,32.721 -7.246,34.753
  rectangle net GND: -8.897,32.568 -7.246,34.854
  rectangle net BAT+: -13.912,32.594 -12.236,34.88
  rectangle net NetBAT1_2: -11.397,32.568 -9.746,34.868

## Silkscreen, mask and mechanical layers (free items; w line width, h text height)
Top Overlay:
  circle w0.025: c-16.706,12.579 r2.75
  circle w0.025: c-9.848,39.63 r2.75
  circle w0.025: c-59.784,11.537 r2.75
  circle w0.025: c-59.886,39.553 r2.75
  circle w0.508: c-46.729,29.495 r0.254
  circle w0.508: c-31.032,28.225 r0.254
  lines w0.025: -52.18,43.562 -52.18,39.562 -46.8,39.562 -46.8,43.562 ; -45.8,43.562 -45.8,39.562 -35.8,39.562 -35.8,43.562 ; -34.8,43.562 -34.8,39.562 -26.61,39.562 -26.61,43.562 ; -25.8,43.562 -25.8,39.562 -15.8,39.562 -15.8,43.562 ; -12.107,13.687 -6.12,5.84 ; -11.921,11.3 -7.154,5.052 -0.038,10.481 -4.806,16.729 ; -7.059,17.539 -1.072,9.692 ; -42.8,1.262 -42.8,4.062 -39.3,4.062 -39.3,1.262 -42.8,1.262 ; -30.3,1.262 -30.3,4.062 -26.8,4.062 -26.8,1.262 -30.3,1.262
  text "B+" at -14.75,36.81 h1.52 r180
  text "+5v" at -18.586,36.709 h0.76
  text "B-" at -8.832,36.582 h1.52 r180
  text "NTC" at -11.499,35.261 h0.76
  text "+" at -46.627,31.679 h0.76 r90
  text "GND" at -48.685,17.582 h0.76
  text "3V3" at -51.402,17.532 h0.76
  text "3V3" at -48.1,11.893 h0.76
  text "SWS" at -48.202,9.251 h0.76
  text "GND" at -48.278,6.457 h0.76
  text "G" at -50.651,2.401 h0.76
Bottom Overlay:
  circle w0.025: c-34.8,12.562 r1.75
  region: -17.764,9.277 -23.764,9.277 -23.764,3.277 -17.764,3.277
  lines w0.025: -37.8,9.562 -31.8,9.562 -31.8,15.562 -37.8,15.562 -37.8,9.562
  text "B+" at -12.82,35.489 h0.76
  text "B-" at -7.435,35.464 h0.76
  text "NTC" at -9.594,35.362 h0.76
  text "Yellow" at -10.839,32.264 h0.76 r90
  text "Black" at -7.333,32.264 h0.76 r90
  text "Red" at -13.125,32.035 h0.76 r90
  text "-" at -30.795,19.896 h0.76 r180
  text "+" at -27.826,19.231 h0.76 r90
  text "S/C YYWW" at -24.977,3.249 h1.5 r270
Top Solder:
  lines w0.7: -10.381,12.198 -9.848,11.563 ; -9.34,12.883 -8.807,12.248 ; -7.003,14.763 -6.47,14.128 ; -6.063,15.423 -5.53,14.788
Mechanical 1:
  lines w0.025: -63.804,8.142 -63.804,0 0,0 0,12.727